# Altium PCB PCB1.PcbDoc
Units mil, origin at the board's own origin, x right, y up, seen from the top; angles counter-clockwise.
Board outline 6000 x 6000 mil, 4 copper layers (Top Layer, Mid Layer 1, Mid Layer 2, Bottom Layer), stack 30.315 mil thick; 5 components, 11 nets, 157 pads, 6 vias.
Unrouted connection lines stored in the file: 28.
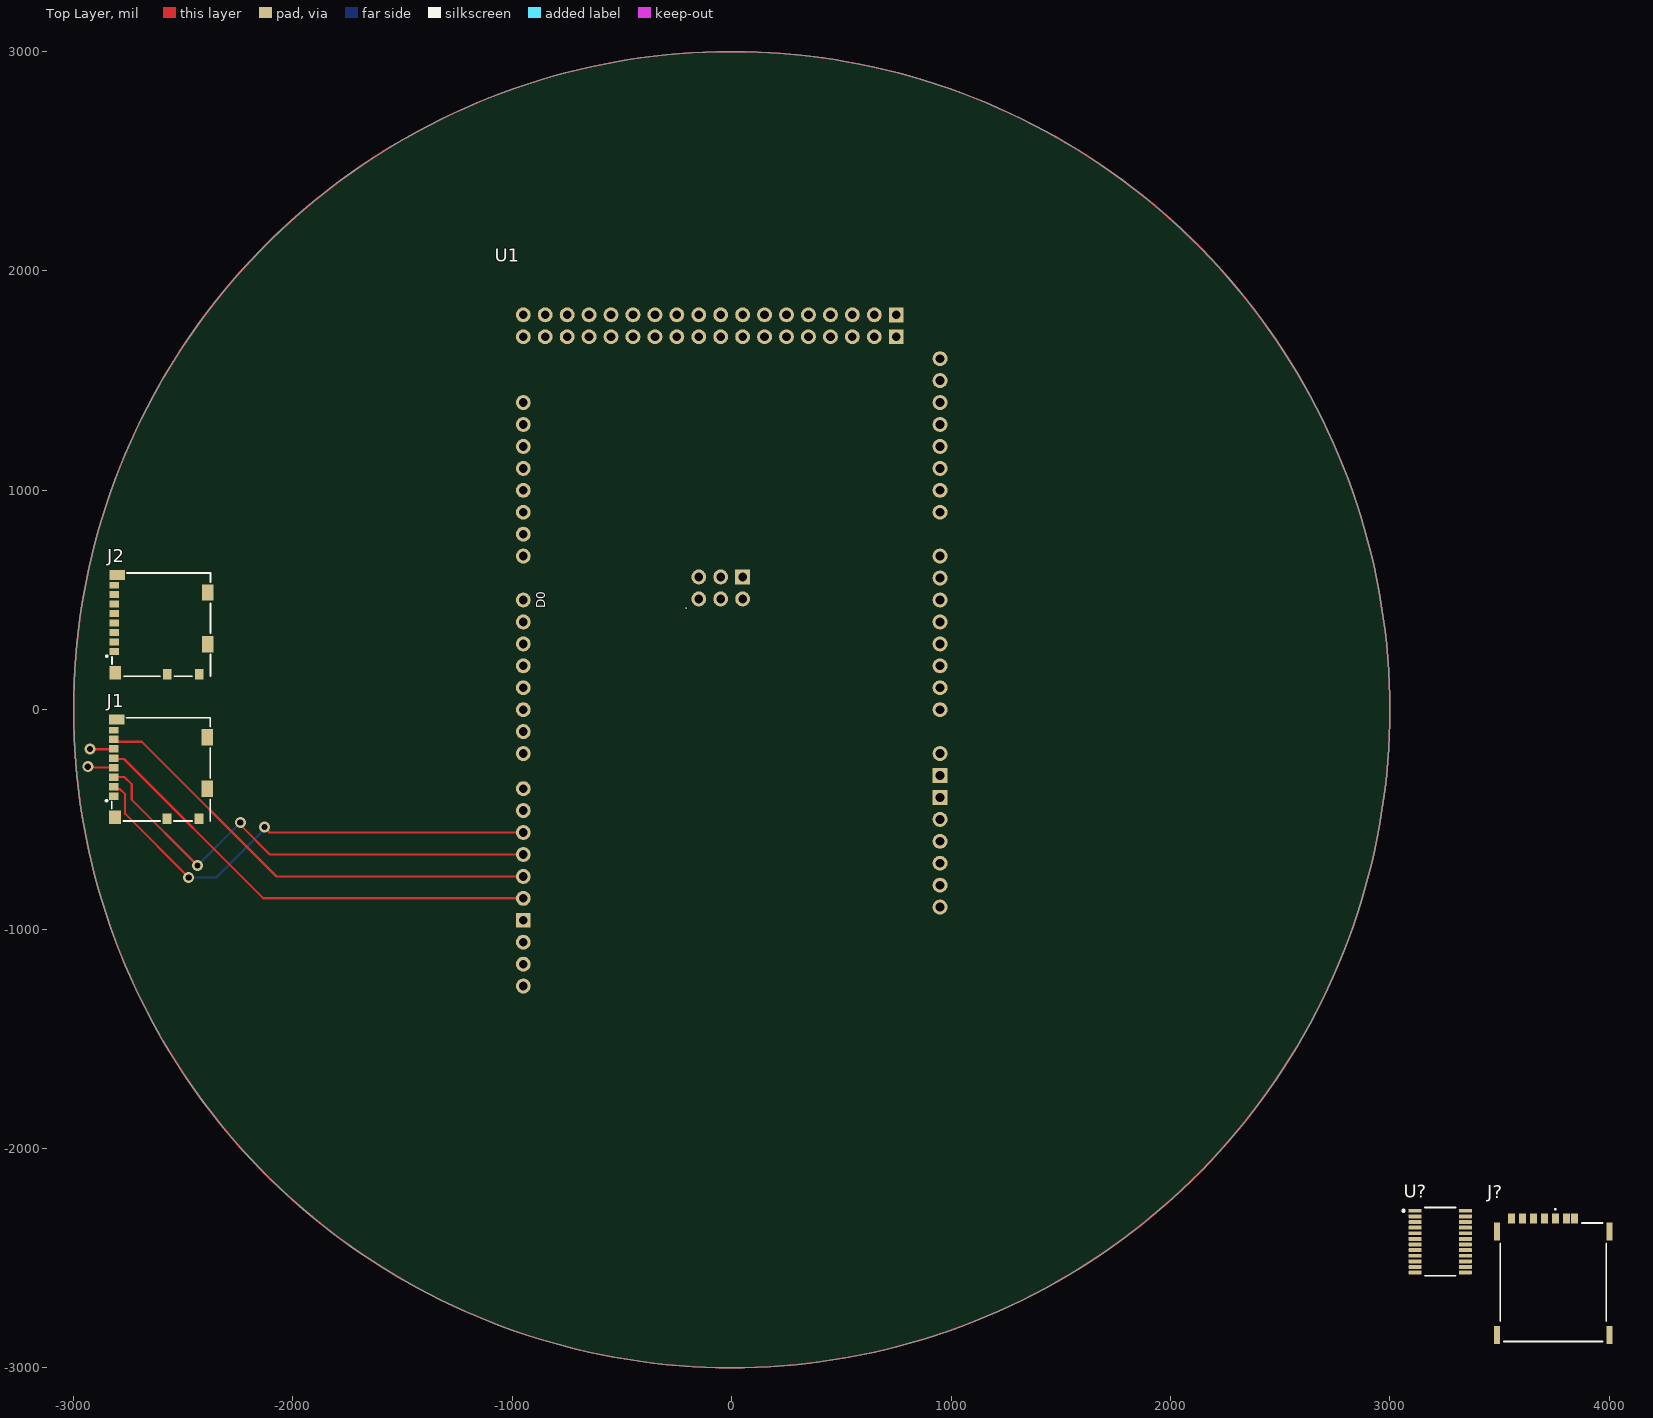
[diagram p0: Top Layer view]
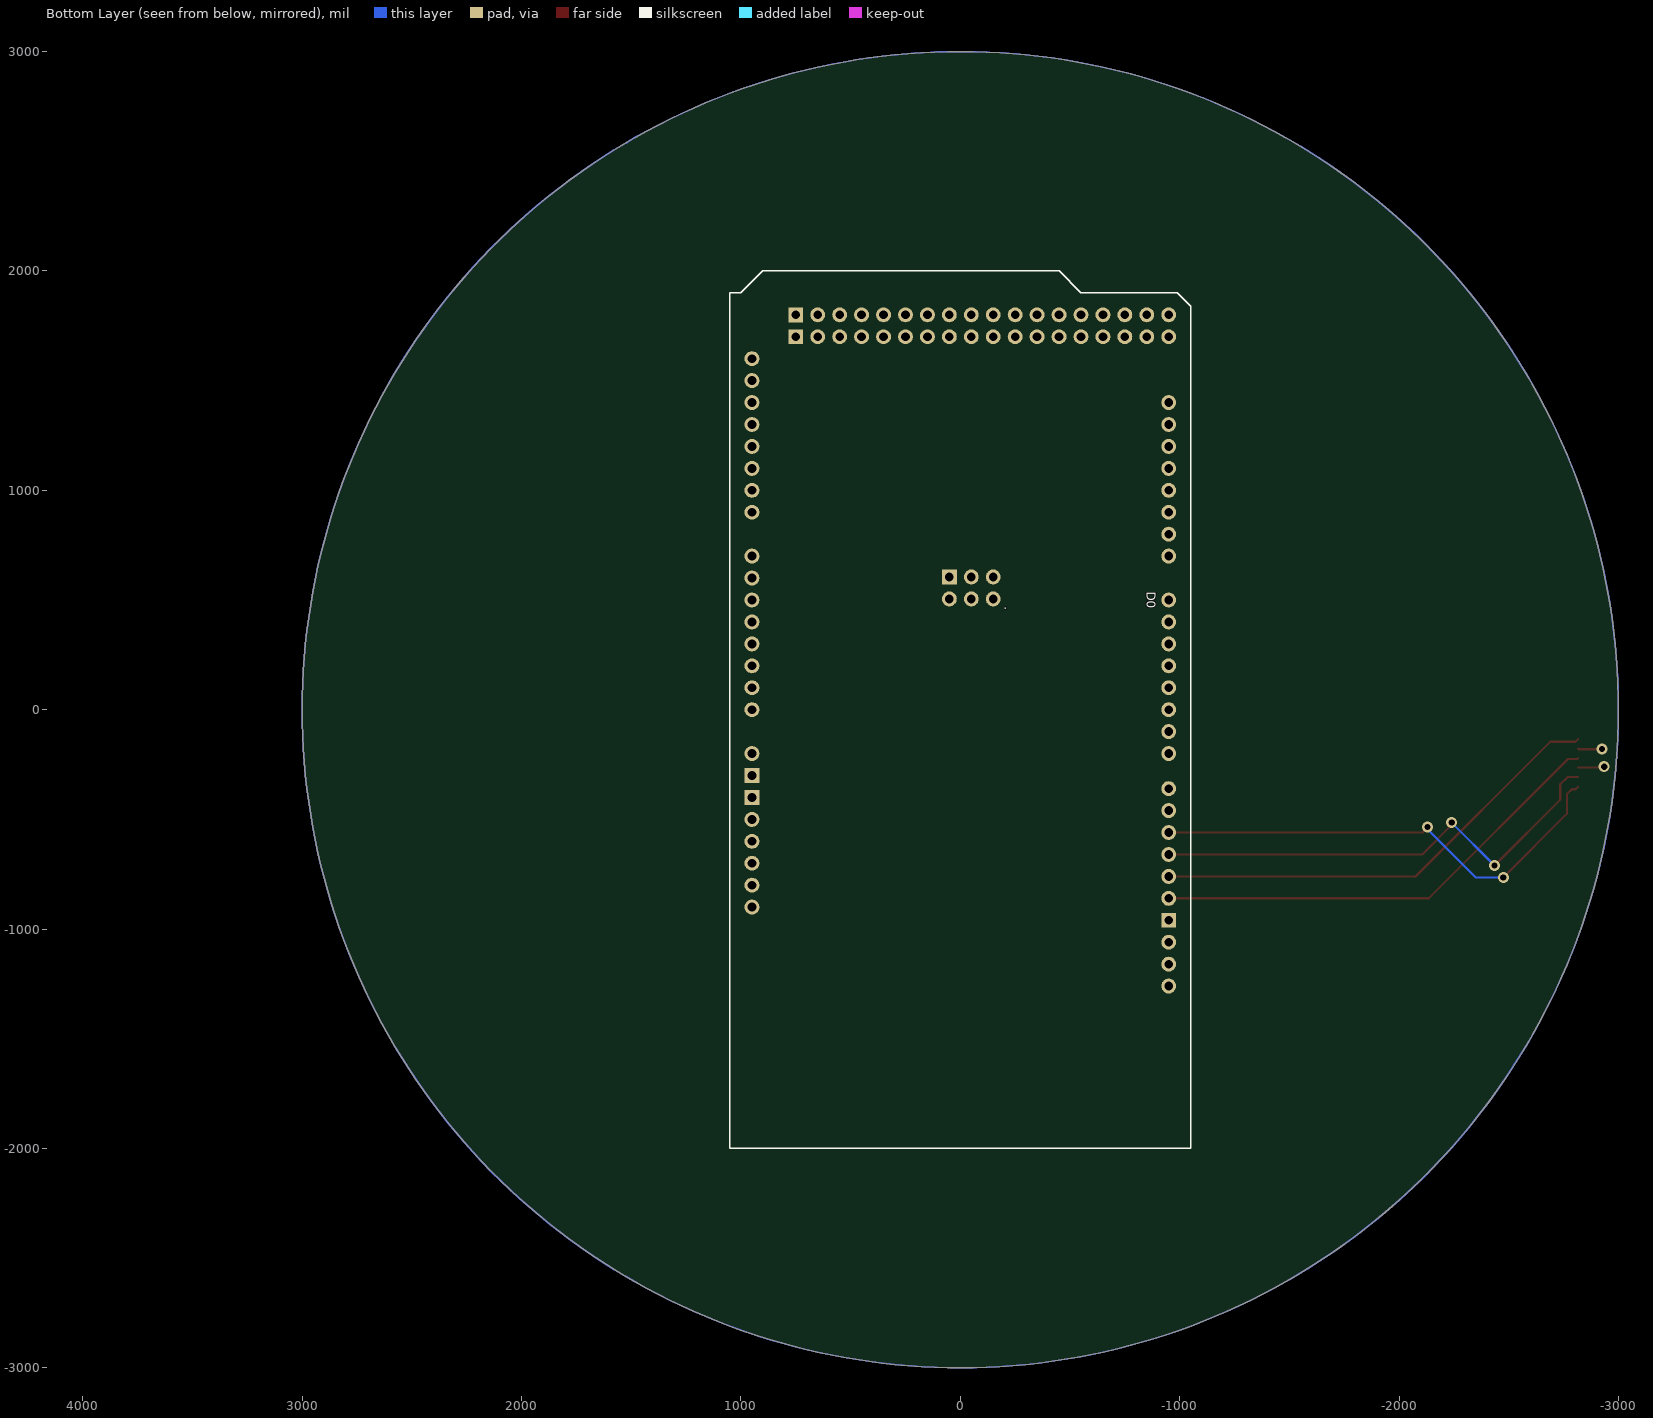
[diagram p1: Bottom Layer view, seen from below]
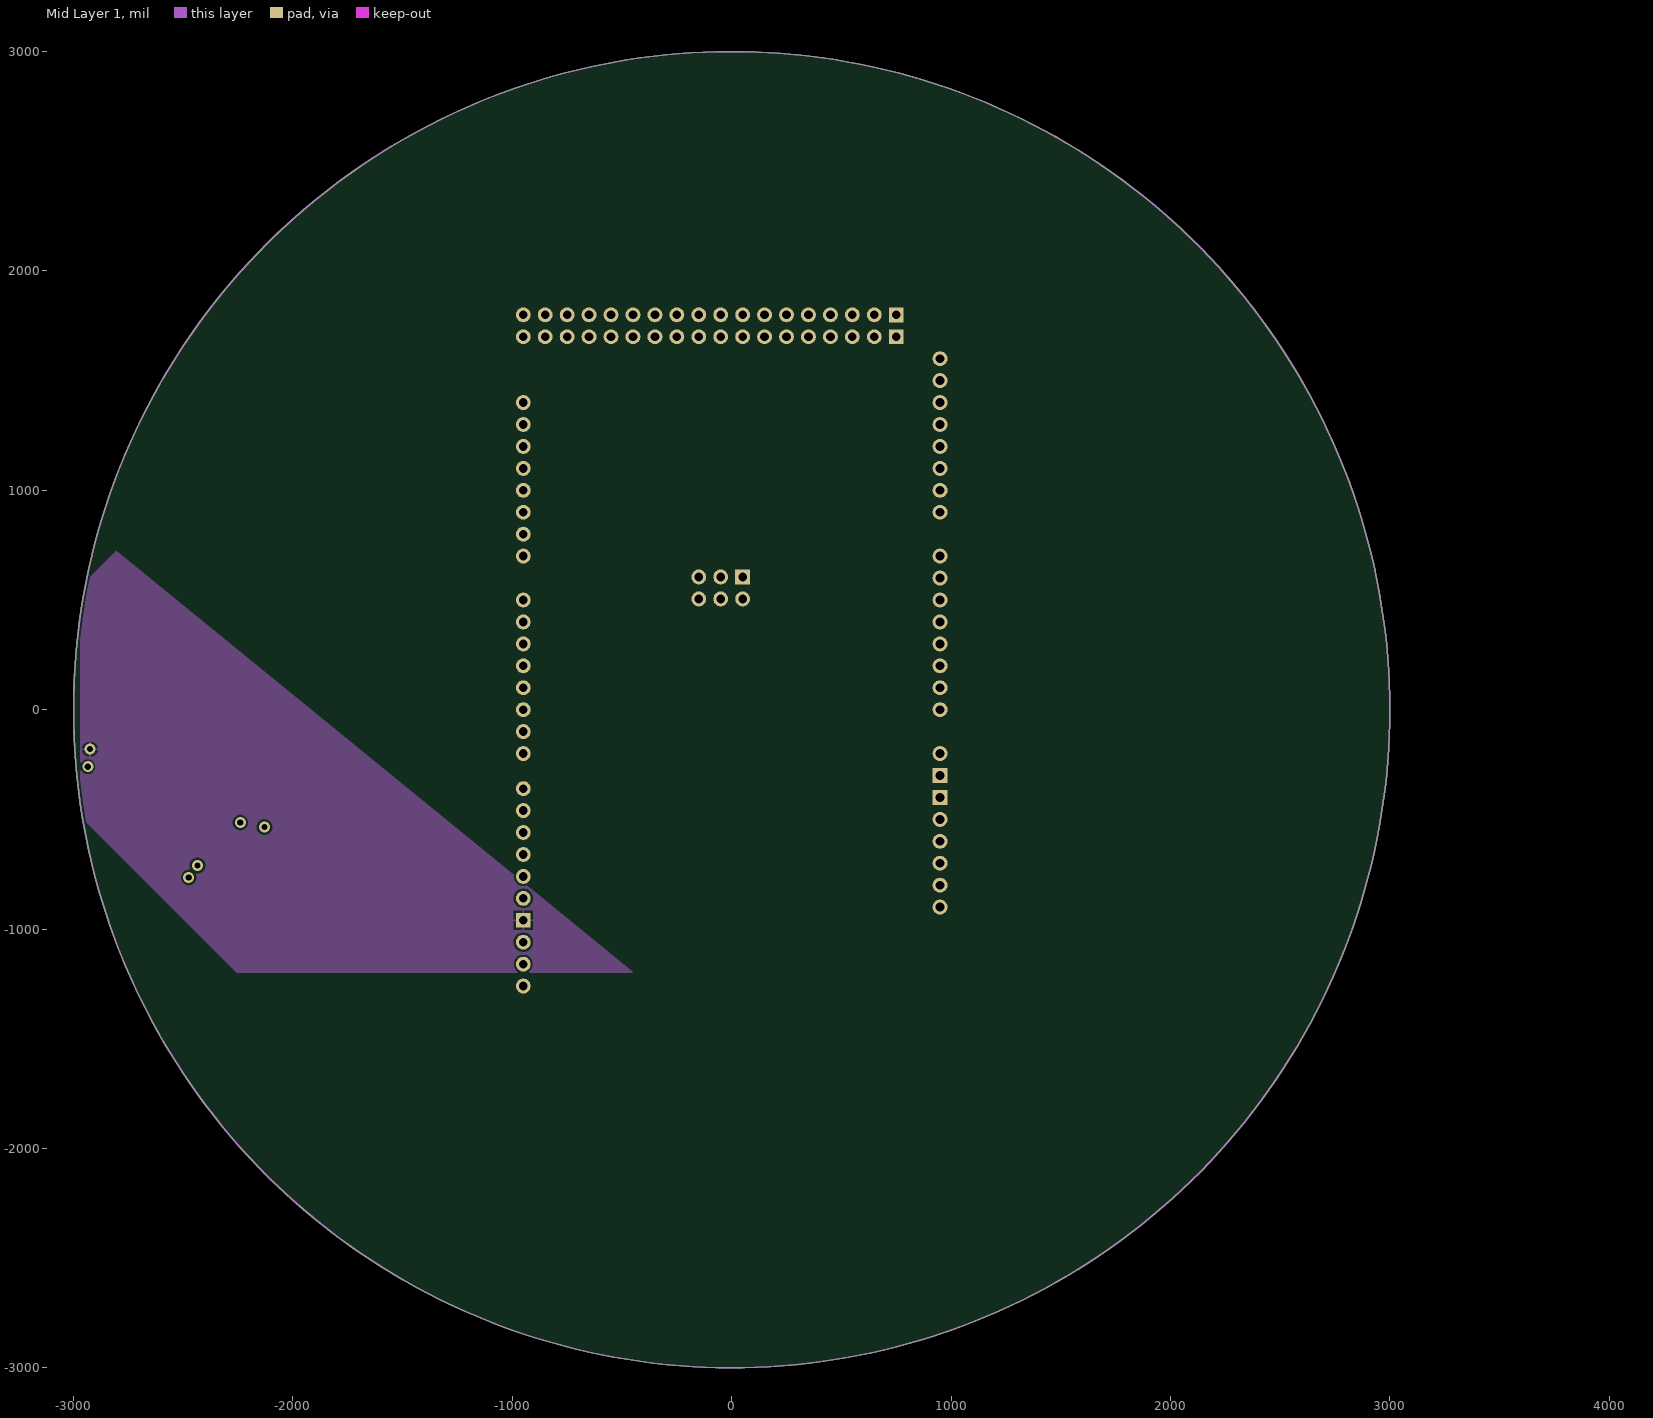
[diagram p2: Mid Layer 1]

## Layer stack, top to bottom
Top Solder: solder mask 0.5, Solder Resist, Dk 3.8
Top Layer: signal copper 1.378
Dielectric 1: prepreg 7.874, 7628, Dk 4.6
Mid Layer 1: signal copper 0.689
Core: core 10.4331, FR-4, Dk 4.5
Mid Layer 2: signal copper 0.689
Dielectric 2: prepreg 7.874, 7628, Dk 4.6
Bottom Layer: signal copper 1.378
Bottom Solder: solder mask 0.5, Solder Resist, Dk 3.8

## Board outline
-3000,0 ccw(c0,0) 0,-3000 ccw(c0,0) 3000,0 ccw(c0,0) 0,3000 ccw(c0,0)

## Design rules (kind name [scope] priority, off if disabled: settings)
Clearance [All] p1: gap=10 ignorepadtopadclearanceinfootprint=FALSE except(0: Arc-Hole Track-Hole SMDPad-Hole THPad-Hole Via-Hole Fill-Hole Poly-Hole Region-Hole Text-Hole)
PolygonConnect [All] p1: connectstyle=Relief reliefconductorwidth=10 reliefentries=4 polygonreliefangle="90 Angle" airgapwidth=10
RoutingVias [All] p1: holewidth=28 width=50 viastyle="Through Hole" minholewidth=28 minwidth=50 maxholewidth=28 maxwidth=50
SolderMaskExpansion [All] p1: expansion=4 istentingtop=FALSE
Width [All] p1: maxlimit=10 minlimit=10 preferedwidth=10
30 further rules are at their usual default settings.

## Components (designator, comment, footprint, x,y, rotation, side; value= is the part's Value field where it differs from the comment)
J1 "104031-0811" 1040310811 -2826.02,-271.85 r270 top
J2 "104031-0811" 1040310811 -2824.84,387.32 r270 top
J? "SIM8066-6-1-14-01-A" SIM8066611401A 3745,-2610 r0 top
U1 "Giga" Arduino_Giga_R1_WiFi_Shield 1050,-2000 r90 top
U? "TCA9548APWR" FP-PW0024A-MFG 3230,-2425 r0 top

## Footprints (in the part's own frame and the unit in brackets; to place one, negate y for a bottom-side part, rotate by r counter-clockwise, add the part's x,y. Pads: shape width x height; smd on the part's side, far side on the other; paste and mask are expansions set on the pad)
1040310811 [mm]
  rect 0.85x1.1 smd: 1(3.105,0.25) 2(2.005,0.25) 3(0.905,0.25) 4(-0.195,0.25) 5(-1.295,0.25) 6(-2.395,0.25) 7(-3.495,0.25)
  rect 0.75x1.1 smd: 8(-4.545,0.25)
  rect 1.17x1.8 smd: 9(-5.755,0.6)
  rect 1.9x1.35 smd: 10(-3.73,11.075) 11(2.24,11.075)
  rect 1.2x1 smd: 12(5.74,10.1) 13(5.74,6.4)
  rect 1.55x1.35 smd: 14(5.565,0.375)
  silkscreen extent -5.97,-0.72 5.97,11.4, body extent -5.97,-0.04 5.98,11.36, height 1.45
Arduino_Giga_R1_WiFi_Shield [mil]
  rrect100% 68x68 hole 40: 3V3(1400,100) 5V1(1500,100) 5V2(2605,1200) 5V3(3700,2000) 5V4(3800,2000) A0(2000,100) A1(2100,100) A2(2200,100) A3(2300,100) A4(2400,100) A5(2500,100) A6(2600,100) A7(2700,100) A8(2900,100) A9(3000,100) A10(3100,100) A11(3200,100) AREF(940,2000) CANR(3500,100) CANT(3600,100) CIPO(1240,2000) COPI(1340,2000) CS(1440,2000) D2(2300,2000) D3(2200,2000) D4(2100,2000) D5(2000,2000) D6(1900,2000) D7(1800,2000) D8(1640,2000) D9(1540,2000) D22(3700,1900) D23(3800,1900) D24(3700,1800) D25(3800,1800) D26(3700,1700) D27(3800,1700) D28(3700,1600) D29(3800,1600) D30(3700,1500) D31(3800,1500) D32(3700,1400) D33(3800,1400) D34(3700,1300) D35(3800,1300) D36(3700,1200) D37(3800,1200) D38(3700,1100) D39(3800,1100) D40(3700,1000) D41(3800,1000) D42(3700,900) D43(3800,900) D44(3700,800) D45(3800,800) D46(3700,700) D47(3800,700) D48(3700,600) D49(3800,600) D50(3700,500) D51(3800,500) D52(3700,400) D53(3800,400) DAC0(3300,100) DAC1(3400,100) IORF(1200,100) MISO(2505,1200) MOSI(2605,1100) NC(1100,100) RST1(1300,100) RST2(2505,1000) RX(2500,2000) RX1(3200,2000) RX2(3000,2000) RX3(2800,2000) SCK1(1140,2000) SCK2(2505,1100) SCL(3400,2000) SCL1(740,2000) SDA(3300,2000) SDA1(840,2000) TX0(2400,2000) TX1(3100,2000) TX2(2900,2000) TX3(2700,2000) VIN(1800,100)
  rect 68x68 hole 40: GND1(1040,2000) GND2(1600,100) GND3(1700,100) GND4(2605,1000) GND5(3700,300) GND6(3800,300)
FP-PW0024A-MFG [mm]
  rrect22% 1.5x0.45 smd paste+0 mask+0: 1(-2.9,3.575) 2(-2.9,2.925) 3(-2.9,2.275) 4(-2.9,1.625) 5(-2.9,0.975) 6(-2.9,0.325) 7(-2.9,-0.325) 8(-2.9,-0.975) 9(-2.9,-1.625) 10(-2.9,-2.275) 11(-2.9,-2.925) 12(-2.9,-3.575) 13(2.9,-3.575) 14(2.9,-2.925) 15(2.9,-2.275) 16(2.9,-1.625) 17(2.9,-0.975) 18(2.9,-0.325) 19(2.9,0.325) 20(2.9,0.975) 21(2.9,1.625) 22(2.9,2.275) 23(2.9,2.925) 24(2.9,3.575)
  silkscreen extent -4.37,-3.95 1.78,3.95, body extent -3.75,-4.2 3.75,4.2, height 0.25
SIM8066611401A [mm]
  rect 0.8x1.14 smd: C1(0.25,7.37) C2(-2.29,7.37) C3(-4.83,7.37) C5(1.52,7.37) C6(-1.02,7.37) C7(-3.56,7.37) CD1(2.47,7.37)
  rect 0.7x2.1 smd: G1(-6.5,5.89) G2(-6.5,-6.11) G3(6.5,-6.11) G4(6.5,5.89)
  round 0.375 hole 0.75 unplated: MH1(3.5,-4.86) MH2(-5,-4.86)
  silkscreen extent -6.14,-6.86 6.14,8.5, body extent -6.59,-6.9 6.5,7.68, height 1.6

## Part data
J1 J2: "Connector", Manufacturer_Name=Molex, Mouser Part Number=538-104031-0811, Datasheet Link=http://www.molex.com/webdocs/datasheets/pdf/en-us/1040310811_MEMORY_CARD_SOCKET.pdf, Manufacturer_Part_Number=104031-0811, Mouser Price/Stock=https://www.mouser.co.uk/ProductDetail/Molex/104031-0811?qs=udsGRKD4nA3Tvy7wqky%252BuA%3D%3D
J?: "Connector", Manufacturer_Name="GCT (GLOBAL CONNECTOR TECHNOLOGY)", Mouser Part Number=640-SIM8066-611401A, Datasheet Link=https://gct.co/connector/sim8066, Height=1.64mm, Manufacturer_Part_Number=SIM8066-6-1-14-01-A, Mouser Price/Stock=https://www.mouser.co.uk/ProductDetail/GCT/SIM8066-6-1-14-01-A?qs=TuK3vfAjtkWgq0pKcqnMSw%3D%3D
U1: library part Component_1
U?: library part CMP-04892-000002-1, "IC I2C SW 8CH W/RESET 24TSSOP", Ambient Temperature Range High=+85°C, Ambient Temperature Range Low=-40°C, Manufacturer="Texas Instruments", Max Supply Voltage=5.5V, Min Supply Voltage=1.65V, Nominal Supply Current=2-50uA, Package=PW0024A, Temperature="-40°C to +85°C", Automotive=No, Category=IC, ComponentLink2Description=Datasheet, ComponentLink2URL=http://www.ti.com/lit/ds/symlink/tca9548a.pdf, Device Class L1="Integrated Circuits (ICs)", Device Class L2="Interface ICs", Device Class L3=Multiplexers, Digikey Description="IC I2C SW 8CH W/RESET 24TSSOP", Height=1.2mm, Interface=I2C,SMBus, Ipc Land Pattern Name=SOP65P640X120-24, Lead Free=Yes, Manufacturer Part Number=TCA9548APWR, Mouser Description="Low-Voltage 8-Channel I2C Switch With Reset 24-TSSOP -40 to 85", Mux Demux Ratio=1:8, Number Of Circuits=1, Octopart=https://octopart.com/tca9548apwr-texas+instruments-22266789, RoHS=TRUE, Standoff Height=0.05mm, Temperature Range High=+85°C, Temperature Range Low=-40°C

## Via types
v1: diameter 50, hole 28, Top Layer to Bottom Layer, 5 vias
v2: diameter 50/50/50/50 (per signal layer), hole 28, Top Layer to Bottom Layer, 1 vias

## Nets (pads, with @x,y where several pads share a name; then routed paths per layer and width w, separated by ;. In a path a pad name is that pad's centre, name@x,y a point inside that pad or via, vN(x,y) a via of type N, cw(c..) or ccw(c..) an arc to the next point about the centre after c; other vN are vias at no path point)
CIPO: J1.7 J2.7 U1.CIPO | length 2125.4
  Top Layer w10: J1.7 -2804.61,-145.83 -2689.4,-145.83 -2075.23,-760 U1.CIPO
COPI: J1.3 J2.3 J?.C7 U1.COPI | length 2210.6
  Top Layer w10: J1.3 -2767.52,-307.48 -2735,-340 -2735,-410 v1(-2435,-710) ; v2@-2240,-525 -2105,-660 U1.COPI
  Bottom Layer w10: v1(-2435,-710) v2(-2240,-515)
CS: J1.2 J2.2 J?.CD1 U1.CS | length 2202.6
  Top Layer w10: J1.2 -2804.61,-362.36 -2788.31,-362.36 -2765,-385.68 -2765,-475 v1(-2475,-765) ; v1(-2130,-535) -2130,-536.72 -2106.72,-560 U1.CS
  Bottom Layer w10: v1(-2475,-765) -2350,-765 -2130,-545 v1(-2130,-535)
D6: U1.D6 U?.1
D7: U1.D7 U?.2
GND: J1.6 J2.6 J?.C2 J?.G1 J?.G2 J?.G3 J?.G4 U1.GND1 U1.MISO U1.RST1 U1.RST2 U?.3 U?.12 U?.21 | length 109.8
  Top Layer w10: v1(-2925,-180) -2818.62,-180 J1.6
SCK1: J1.5 J2.5 J?.C3 U1.SCK1 | length 2130.9
  Top Layer w10: J1.5 -2812.43,-224.61 -2770.39,-224.61 -2135,-860 U1.SCK1
SCL: U1.SCL U?.22
SDA: U1.SDA U?.23
VCC: U1.3V3 U?.24
VDD: J1.4 J2.4 J?.C1 J?.C6 U1.5V1 | length 120.5
  Top Layer w10: v1(-2935,-260) -2930.83,-264.17 J1.4
pads on no net: J1.1 J1.8 J1.9 J1.10 J1.11 J1.12 J1.13 J1.14 J2.1 J2.8 J2.9 J2.10 J2.11 J2.12 J2.13 J2.14 J?.C5 J?.MH1 J?.MH2 U1.5V2 U1.5V3 U1.5V4 U1.A0 U1.A1 U1.A2 U1.A3 U1.A4 U1.A5 U1.A6 U1.A7 U1.A8 U1.A9 U1.A10 U1.A11 U1.AREF U1.CANR U1.CANT U1.D2 U1.D3 U1.D4 U1.D5 U1.D8 U1.D9 U1.D22 U1.D23 U1.D24 U1.D25 U1.D26 U1.D27 U1.D28 U1.D29 U1.D30 U1.D31 U1.D32 U1.D33 U1.D34 U1.D35 U1.D36 U1.D37 U1.D38 U1.D39 U1.D40 U1.D41 U1.D42 U1.D43 U1.D44 U1.D45 U1.D46 U1.D47 U1.D48 U1.D49 U1.D50 U1.D51 U1.D52 U1.D53 U1.DAC0 U1.DAC1 U1.GND2 U1.GND3 U1.GND4 U1.GND5 U1.GND6 U1.IORF U1.MOSI U1.NC U1.RX U1.RX1 U1.RX2 U1.RX3 U1.SCK2 U1.SCL1 U1.SDA1 U1.TX0 U1.TX1 U1.TX2 U1.TX3 U1.VIN U?.4 U?.5 U?.6 U?.7 U?.8 U?.9 U?.10 U?.11 U?.13 U?.14 U?.15 U?.16 U?.17 U?.18 U?.19 U?.20

## Polygon pours and split planes (outlines as drawn)
GND on Mid Layer 1 "GND_L02_P000" (solid, pour order 0): -2805,725 -2970,560 -2970,-485 -2255,-1200 -445,-1200

## Other copper
Multi-Layer:
  circle w6: c0,0 r3000

## Text inside footprints (layer, text, board x,y; h text height)
U1: Top Overlay "D0" at -849.41,463.45 h39.37 r90; Bottom Overlay "D0" at -849.41,536.55 h39.37 r90; Mechanical 5 "USB A" at 130.71,-1750.49 h19.68 r90; Mechanical 5 "Audio Jack" at 688.66,-1726.49 h19.68 r90; Mechanical 5 "USB C" at -492.32,-1850.56 h19.68 r90